# EAGLE board LED_Chaser_Board (EAGLE 9.6.2)
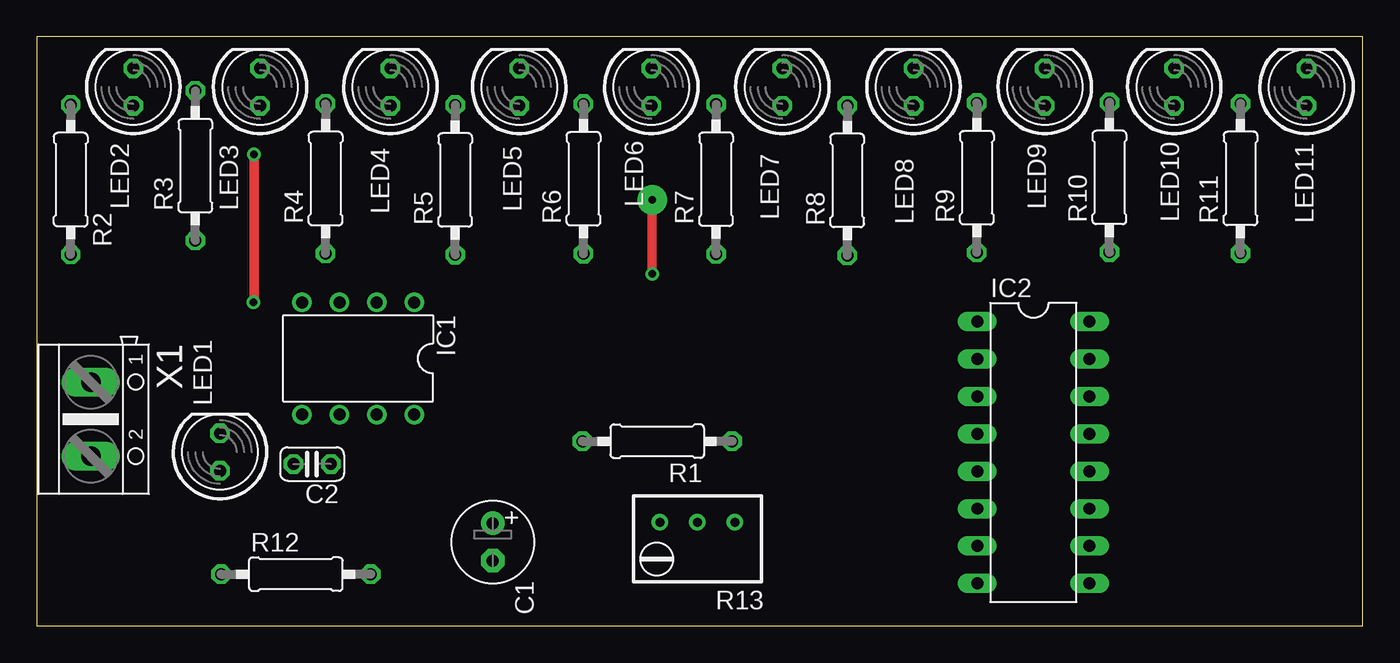
[diagram p0: board, top side]
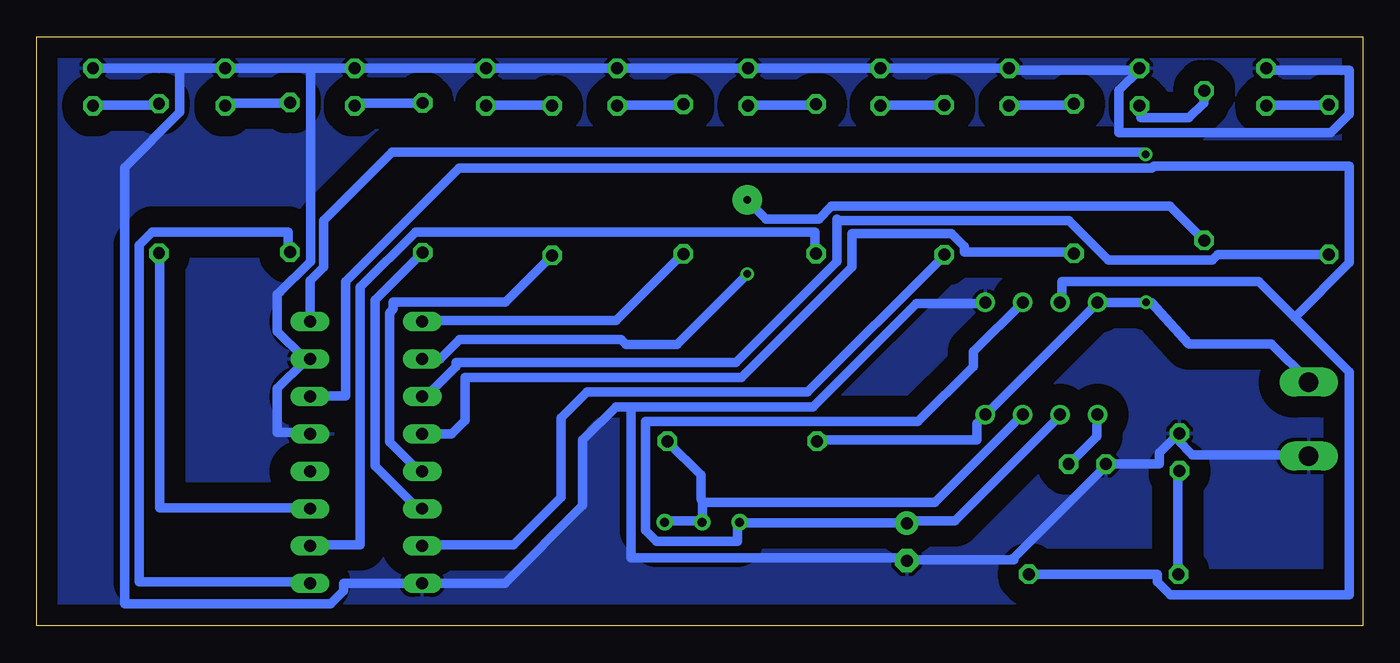
[diagram p1: board, bottom side, seen from below]

Size 90 x 40 mm. Coordinates in mm from the lower left corner, seen from the top.
Outline: 0,0 90,0 90,40 0,40 0,0
Copper layers (1*16): Top 0mil / dielectric 1.5mm / Bottom 0.035mm
Design rules "default *": minimum track width 25mil, minimum drill 0.5mm, track to track 10mil, track to pad 6mil, pad to pad 6mil, via to via 6mil, smd to smd 6mil, copper to edge 20mil, drill to drill 6mil, minimum pad ring 10mil, minimum via ring 8mil, stop-mask expansion 4mil, vias tented up to drill 0mil, thermal gap 10mil

## Footprints (pad centres in the part's own frame; a part is rotated, then mirrored left to right if it is on the bottom)
E2,5-6 = drill 0.813 pad 1.6: + -1.27,0 | drill 0.813 pad 1.6 octagon: - 1.27,0
C025-024X044 = drill 0.813 octagon: 1 -1.27,0; 2 1.27,0
DIL08 = drill 0.813 pad 1.27: 1 -3.81,-3.81; 2 -1.27,-3.81; 3 1.27,-3.81; 4 3.81,-3.81; 5 3.81,3.81; 6 1.27,3.81; 7 -1.27,3.81; 8 -3.81,3.81
DIL16 = drill 0.813 long: 1 -8.89,-3.81; 2 -6.35,-3.81; 3 -3.81,-3.81; 4 -1.27,-3.81; 5 1.27,-3.81; 6 3.81,-3.81; 7 6.35,-3.81; 8 8.89,-3.81; 9 8.89,3.81; 10 6.35,3.81; 11 3.81,3.81; 12 1.27,3.81; 13 -1.27,3.81; 14 -3.81,3.81; 15 -6.35,3.81; 16 -8.89,3.81
LED5MM = drill 0.813 octagon: A -1.27,0; K 1.27,0
0207/10 = drill 0.813 octagon: 1 -5.08,0; 2 5.08,0
RTRIM3299W = drill 0.61: 1 1.27,-2.54; 2 1.27,0; 3 1.27,2.54
AK500/2 = drill 1.321 long: 1 -2.515,0; 2 2.515,0

## Placement (x,y rotation side)
C1  10u  [E2,5-6]  30.95,5.7 270 top
C2  10n  [C025-024X044]  18.69,10.99 180 top
IC1  NE555N  [DIL08]  21.81,18.16 180 top
IC2  4017  [DIL16]  67.65,11.77 270 top
LED1  [LED5MM]  12.43,11.8 90 top
LED2  [LED5MM]  6.55,36.59 90 top
LED3  [LED5MM]  15.15,36.59 90 top
LED4  [LED5MM]  24,36.59 90 top
LED5  [LED5MM]  32.75,36.59 90 top
LED6  [LED5MM]  41.71,36.59 90 top
LED7  [LED5MM]  50.61,36.59 90 top
LED8  [LED5MM]  59.51,36.59 90 top
LED9  [LED5MM]  68.42,36.59 90 top
LED10  [LED5MM]  77.21,36.59 90 top
LED11  [LED5MM]  86.19,36.59 90 top
R1  10k  [0207/10]  42.11,12.54 180 top
R2  150E  [0207/10]  2.3,30.3 90 top
R3  150E  [0207/10]  10.76,31.25 90 top
R4  150E  [0207/10]  19.6,30.37 90 top
R5  150E  [0207/10]  28.4,30.28 90 top
R6  150E  [0207/10]  37.11,30.36 90 top
R7  150E  [0207/10]  46.11,30.33 90 top
R8  150E  [0207/10]  55.01,30.24 90 top
R9  150E  [0207/10]  63.81,30.43 90 top
R10  150E  [0207/10]  72.81,30.45 90 top
R11  150E  [0207/10]  81.71,30.38 90 top
R12  150E  [0207/10]  17.58,3.51 0 top
R13  10k  [RTRIM3299W]  44.84,5.76 90 top
X1  9V  [AK500/2]  3.66,14.04 270 top

## Library data of the parts
C1 C2 = rcl; SPICEPREFIX: C
IC1 = linear
IC2 = ic-package
LED1-LED11 = led
R1-R12 = rcl; SPICEPREFIX: R
R13 = rcl; SPICEMODEL: X; SPICEPREFIXL: POT
X1 = con-ptr500; OC_FARNELL: unknown; OC_NEWARK: unknown

## Nets
0: C1.- C2.2 IC1.1 IC2.8 IC2.13 IC2.15 LED1.K LED2.K LED3.K LED4.K LED5.K LED6.K LED7.K LED8.K LED9.K LED10.K LED11.K X1.2
N$1: LED2.A R2.2
N$2: LED3.A R3.2
N$3: LED4.A R4.2
N$4: LED5.A R5.2
N$5: LED6.A R6.2
N$6: LED7.A R7.2
N$7: LED8.A R8.2
N$8: LED9.A R9.2
N$9: LED10.A R10.2
N$10: LED11.A R11.2
N$12: IC2.4 R4.1
N$13: IC2.2 R3.1
N$14: IC2.6 R9.1
N$15: IC2.7 R5.1
N$16: IC2.10 R6.1
N$17: IC2.9 R10.1
N$18: IC2.5 R8.1
N$20: IC2.1 R7.1
N$21: IC2.11 R11.1
N$22: IC2.3 R2.1
N$25: IC1.3 IC2.14 R12.2
N$26: LED1.A R12.1
N$28: IC1.7 R1.1 R13.1 R13.2
N$31: C1.+ IC1.2 IC1.6 R13.3
N$33: C2.1 IC1.5
VCC: IC1.4 IC1.8 IC2.16 R1.2 X1.1

## Tracks (layer width: path | path; a pad name or v marks a point on that pad's centre or on a via)
0
  Bottom 0.635: X1.2 3.67,11.62 11.55,11.62 12.55,12.62 LED1.K 12.55,13 13.8,11.75 13.8,11 17.3,11 C2.2 17.55,10.75 23.68,4.62 23.68,4.5 30.93,4.5 C1.- 31.18,4.62 49.67,4.62 49.67,14.88 | 49.67,14.88 50.68,14.88 52.94,12.62 52.94,8.17 58.23,2.88 IC2.8 64.17,2.88 69.17,2.88 69.17,2.38 70.05,1.5 84.05,1.5 84.05,31.12 80.3,34.88 80.3,37.88 | 49.67,14.88 37.3,14.88 30.3,21.88 25.68,21.88 IC1.1 | IC2.13 71.55,13.12 73.67,13.12 73.67,16.12 71.8,18 71.55,18 IC2.15 71.92,18.25 73.67,20 73.67,22.5 71.42,24.75 71.42,37.88 | LED2.K 6.55,37.75 0.93,37.75 0.93,34.75 2.17,33.5 16.55,33.5 16.55,36.38 15.18,37.75 LED3.K 15.55,37.75 23.93,37.75 LED4.K 24.3,37.88 32.67,37.88 LED5.K 33.05,37.88 41.67,37.88 LED6.K 41.92,37.88 50.55,37.88 LED7.K 50.92,37.88 59.42,37.88 LED8.K 59.8,37.88 68.3,37.88 LED9.K 68.67,37.88 71.42,37.88 | 71.42,37.88 77.17,37.88 LED10.K 77.42,37.88 80.3,37.88 | 80.3,37.88 86.17,37.88 LED11.K
  pour Bottom (isolate 1.422): 90,0 0,0 0,40 90,40
N$1
  Bottom 0.635: R2.2 6.55,35.38 LED2.A
N$2
  Bottom 0.635: R3.2 10.8,35.5 11.8,34.5 15.05,34.5 15.05,35.25 LED3.A
N$3
  Bottom 0.635: R4.2 19.68,35.38 23.93,35.38 LED4.A
N$4
  Bottom 0.635: R5.2 28.43,35.38 32.67,35.38 LED5.A
N$5
  Bottom 0.635: R6.2 37.17,35.38 41.67,35.38 LED6.A
N$6
  Bottom 0.635: R7.2 46.17,35.38 50.55,35.38 LED7.A
N$7
  Bottom 0.635: R8.2 55.05,35.38 59.42,35.38 LED8.A
N$8
  Bottom 0.635: R9.2 63.92,35.5 68.3,35.5 68.3,35.38 LED9.A
N$9
  Bottom 0.635: R10.2 72.92,35.5 77.17,35.5 77.17,35.38 LED10.A
N$10
  Bottom 0.635: R11.2 81.8,35.38 86.17,35.38 LED11.A
N$12
  Bottom 0.635: R4.1 19.68,25.38 27.05,25.38 27.05,25.75 27.93,26.62 34.67,26.62 34.67,24.38 42.17,16.88 60.92,16.88 60.92,13.96 61.85,13.04 IC2.4
N$13  (via drill 0.5, 0.5 pad 2)
  Top 0.635: v41.77,23.89 41.77,28.91 v41.76,28.91 v41.77,28.92
  Bottom 0.635: R3.1 13.1,28.51 36.04,28.51 36.92,27.64 40.52,27.64 41.77,28.89 v41.77,28.92 | IC2.2 62.64,18.12 61.3,19.46 50.36,19.46 50.02,19.12 46.55,19.12 v41.77,23.9 v41.77,23.89
N$14
  Bottom 0.635: R9.1 63.92,25.25 67.05,22.12 67.05,10.88 64.17,8 63.92,8 IC2.6
N$15
  Bottom 0.635: R5.1 28.43,25.12 37.67,15.88 52.66,15.88 54.4,14.13 54.4,8.73 57.63,5.5 63.8,5.5 IC2.7
N$16
  Bottom 0.635: IC2.10 71.42,5.5 68.05,5.5 68.05,23 64.3,26.75 37.17,26.75 37.17,25.38 R6.1
N$17
  Bottom 0.635: IC2.9 71.55,3 83.05,3 83.05,25.88 82.17,26.75 72.92,26.75 72.92,25.38 R10.1
N$18
  Bottom 0.635: IC2.5 64.05,10.5 66.05,12.5 66.05,21.25 65.8,21.5 65.8,22 58.17,22 55.05,25.12 R8.1
N$20
  Bottom 0.635: R7.1 46.17,25.25 50.67,20.75 63.8,20.75 IC2.1
N$21
  Bottom 0.635: IC2.11 71.55,8 81.67,8 81.67,25.25 R11.1
N$22
  Bottom 0.635: IC2.3 63.8,15.62 63.55,15.62 61.55,17.62 61.55,17.88 42.55,17.88 35.67,24.75 35.67,27.62 35.56,27.51 19.94,27.51 17.26,24.84 10.21,24.84 9.82,25.22 R2.1
N$25
  Bottom 0.635: 4.61,20.94 7.05,23.38 20.43,23.38 20.43,22 IC1.3 | 4.61,20.94 0.93,17.25 0.93,2.12 13.05,2.12 13.93,3 13.93,3.5 22.55,3.5 R12.2 | IC2.14 71.42,15.62 69.05,15.62 69.05,23.38 61.34,31.08 14.31,31.08 14.17,31.22 0.9,31.22 0.9,24.65 4.61,20.94
N$26
  Bottom 0.635: R12.1 12.55,3.62 12.55,10.5 LED1.A
N$28
  Bottom 0.635: R13.1 47.3,7.12 44.92,7.12 R13.2 44.8,7.38 44.8,8.38 | 44.8,8.38 29.05,8.38 23.18,14.25 IC1.7 | R1.1 47.17,12.5 44.92,10.25 44.92,8.62 44.8,8.38
N$31
  Bottom 0.635: IC1.6 20.55,14.25 27.68,7.12 30.68,7.12 C1.+ 31.05,7 42.3,7 R13.3 42.42,6.75 42.42,5.75 47.92,5.75 48.67,6.5 48.67,13.88 30.18,13.88 26.43,17.62 26.43,18.62 IC1.2
N$33
  Bottom 0.635: C2.1 19.93,11 18.05,12.88 18.05,14.25 IC1.5
VCC  (via drill 0.5)
  Top 0.635: v14.7,21.97 14.74,22.01 v14.74,32.02
  Bottom 0.635: R1.2 36.92,12.62 26.18,12.62 26.18,13.75 25.8,14.12 IC1.8 25.55,14.38 18.05,21.88 18.05,21.92 IC1.4 v14.7,21.97 14.35,21.97 11.79,19.15 6.2,19.15 3.67,16.62 X1.1 | IC2.16 71.46,23.46 70.54,24.38 70.54,27.53 65.89,32.18 14.67,32.18 14.67,32.09 v14.74,32.02